# Altium PCB PCB1.PcbDoc
Units mm, origin at the board's own origin, x right, y up, seen from the top; angles counter-clockwise.
Board outline 100 x 86.6 mm, 2 copper layers (Top Layer, Bottom Layer); 48 components, 23 nets, 180 pads, 258 vias.
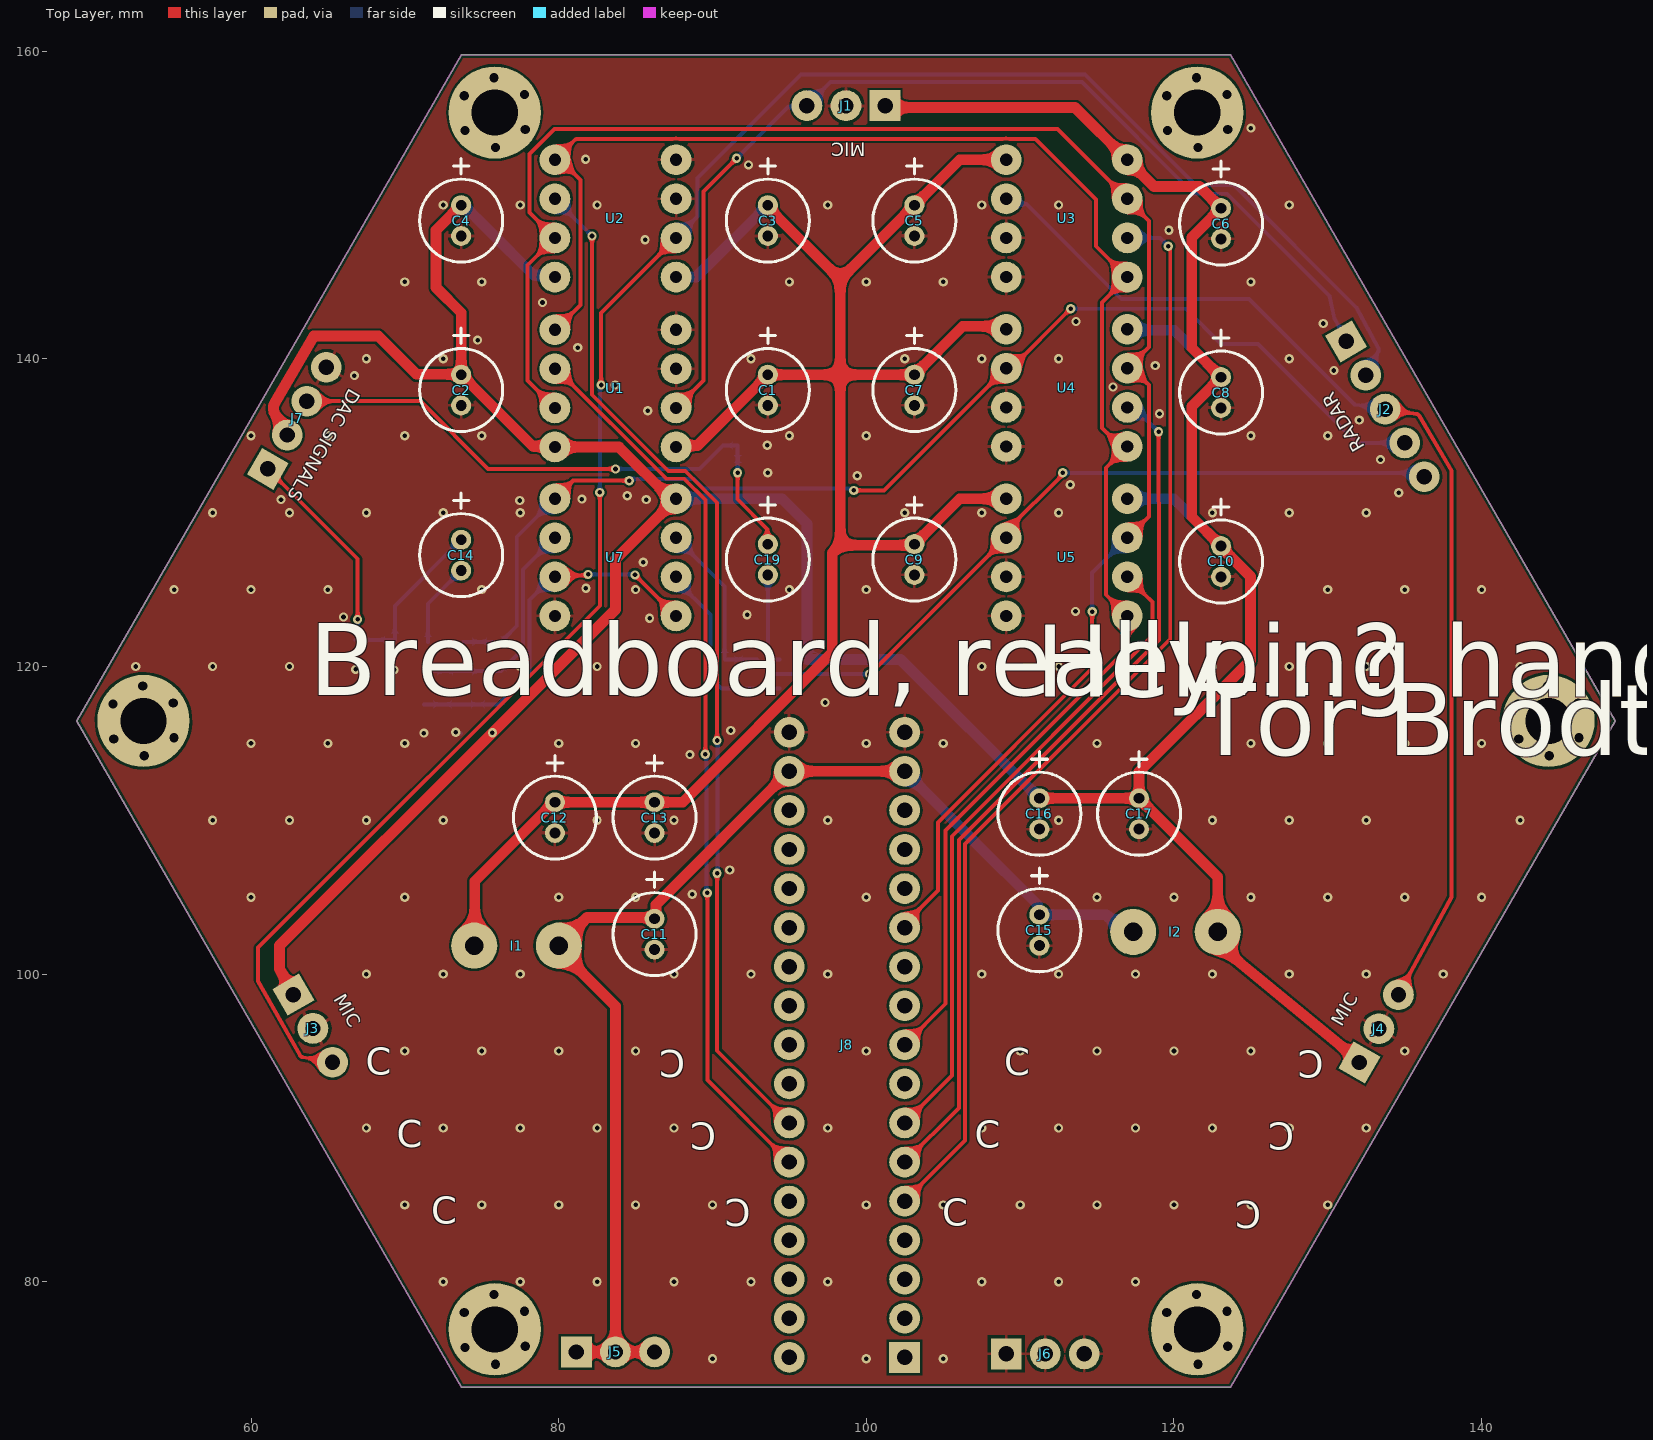
[diagram p0: Top Layer view]
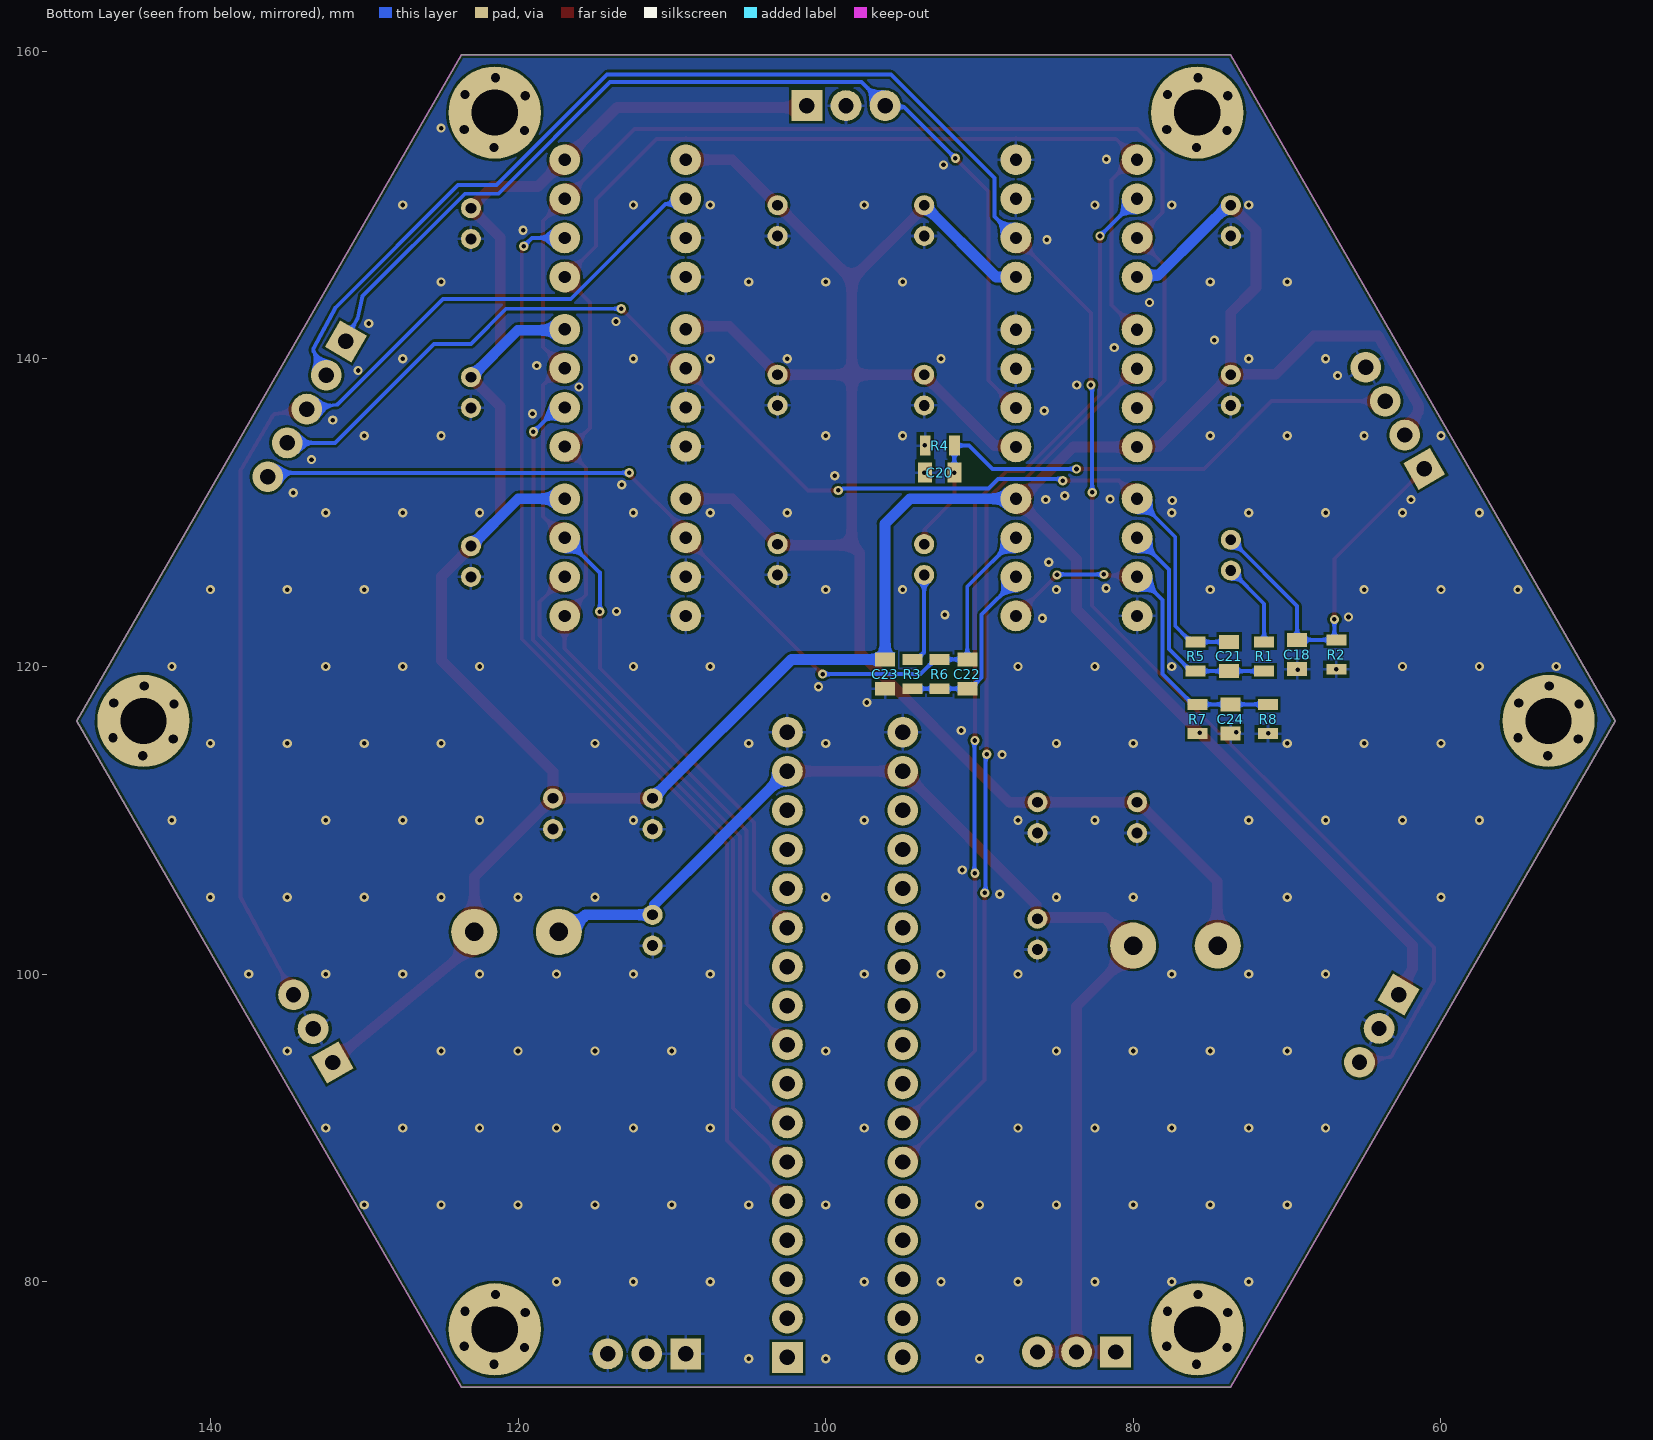
[diagram p1: Bottom Layer view, seen from below]
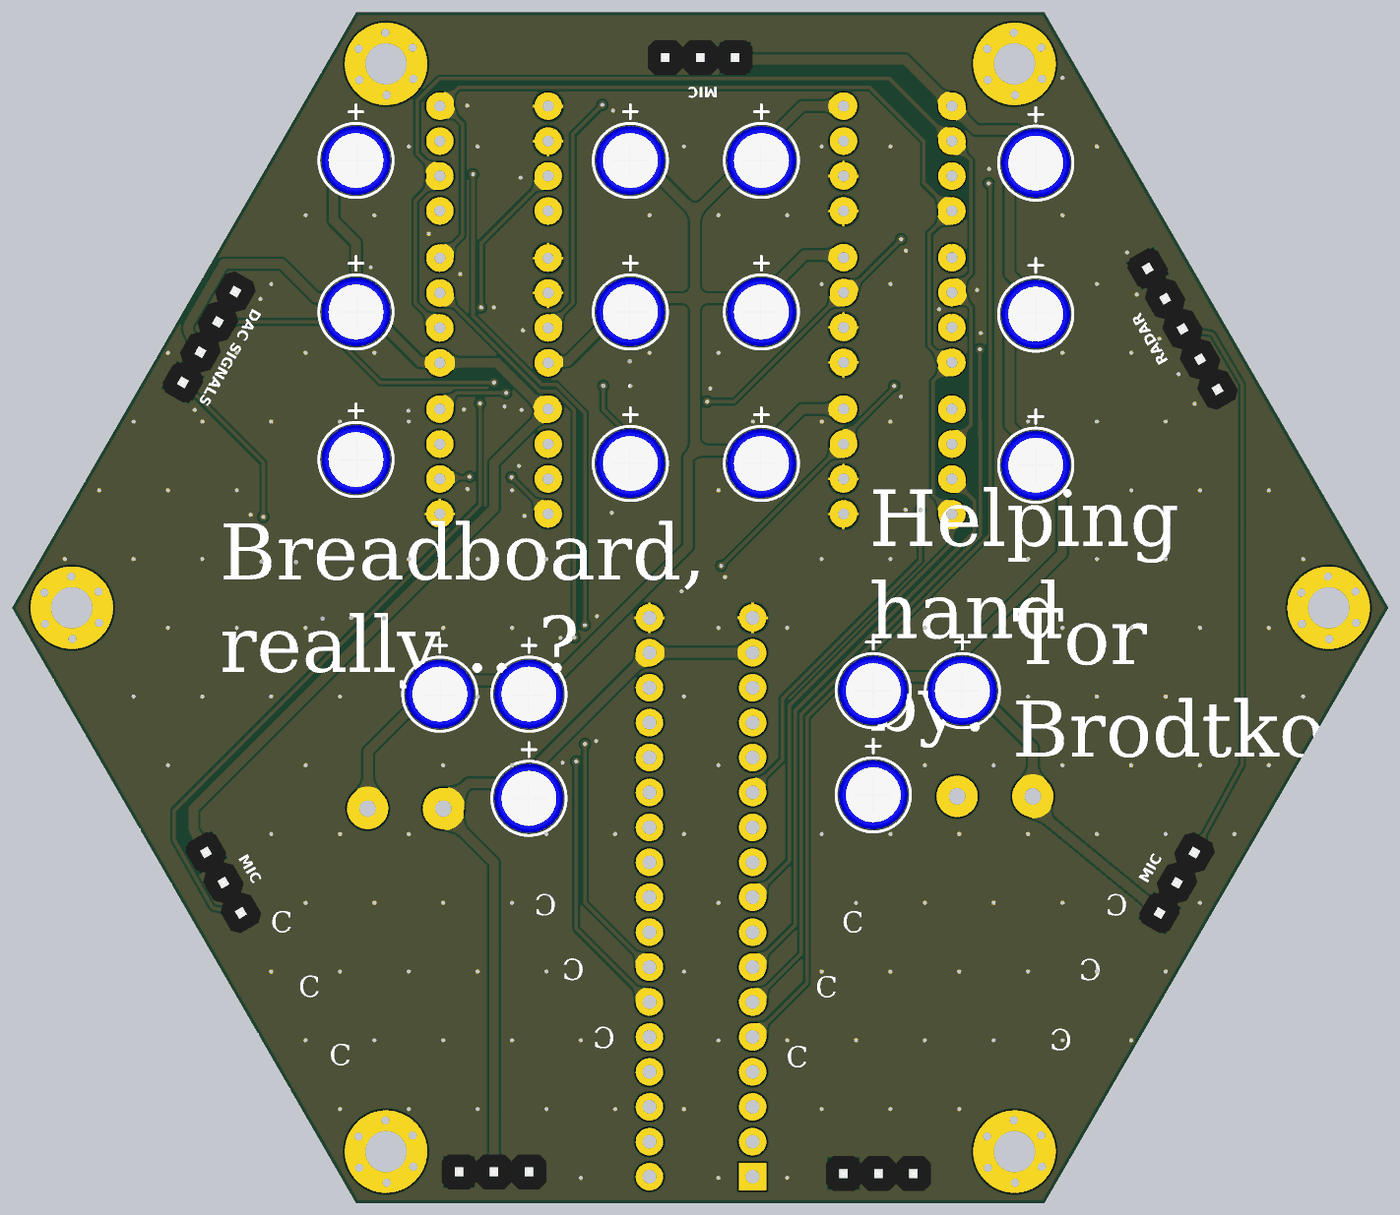
[diagram p2: 3D render of the assembled board from above, using the file's embedded part models]
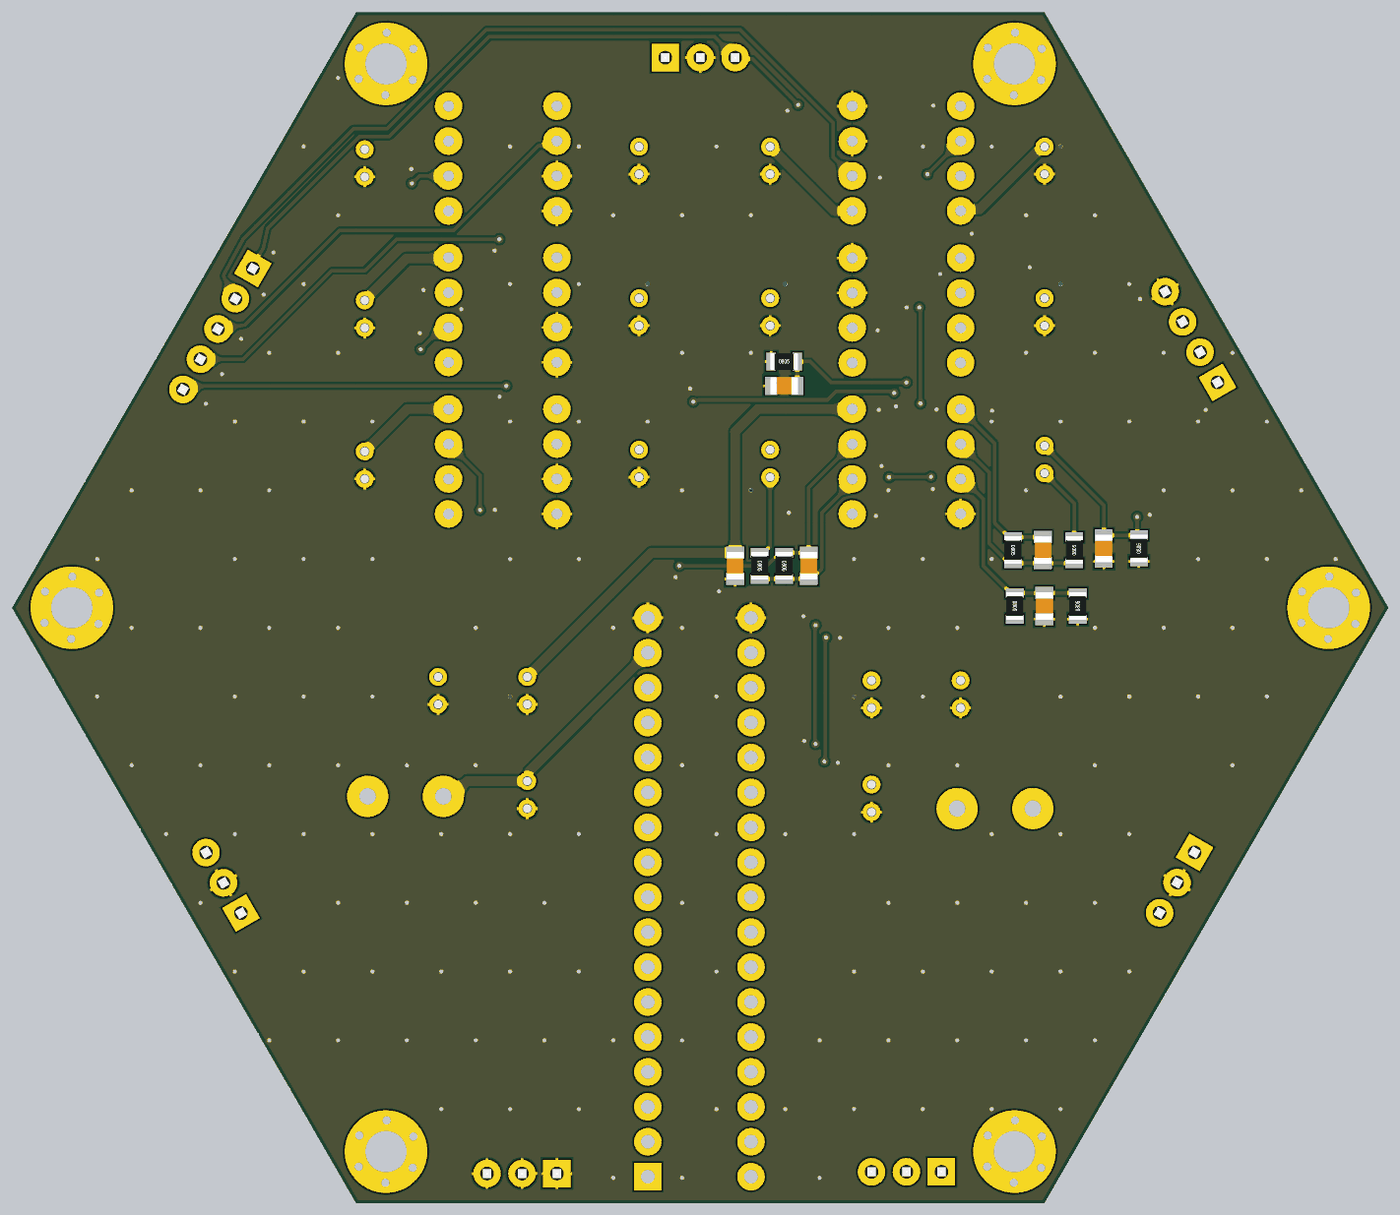
[diagram p3: 3D render of the assembled board from below, using the file's embedded part models]

## Layer stack, top to bottom
Top Solder: solder mask 0.0102, Solder Resist, Dk 3.5
Top Layer: signal copper 0.0356
Dielectric 1: dielectric 0.32, FR-4, Dk 4.8
Bottom Layer: signal copper 0.0356
Bottom Solder: solder mask 0.0102, Solder Resist, Dk 3.5

## Board outline
73.679,73.158 48.679,116.459 73.679,159.76 123.679,159.76 148.679,116.459 123.679,73.158

## Design rules (kind name [scope] priority, off if disabled: settings)
Clearance [All] p1: gap=0.16 ignorepadtopadclearanceinfootprint=FALSE except(0: Arc-Text Arc-Hole Track-Text Track-Hole SMDPad-Text SMDPad-Hole THPad-Text THPad-Hole Via-Text Via-Hole Fill-Text Fill-Hole Poly-Text Poly-Hole Region-Text Region-Hole Text-Text Text-Hole)
DiffPairsRouting [All] p1: maxlimit=0.254 minlimit=0.254 mostfreqgap=0.254 toplayer_minwidth=0.16 toplayer_maxwidth=0.381 toplayer_prefwidth=0.2 bottomlayer_minwidth=0.16 bottomlayer_maxwidth=0.381 bottomlayer_prefwidth=0.2 maxuncoupledlength=12.7
Height [All] p1: minheight=0 maxheight=200 prefheight=12.7
HoleSize [All] p1: absolutevalues=TRUE maxlimit=6.35 minlimit=0.3 maxpercent=80.000 minpercent=20.000
MinimumSolderMaskSliver [All] p1: minsoldermaskwidth=0.1
PlaneClearance [All] p1: clearance=1
PlaneConnect [All] p1: planeconnectstyle=Relief reliefexpansion=0.508 reliefentries=4 reliefconductorwidth=1 reliefairgap=0.254
PolygonConnect PolygonConnect_1 [IsVia] p1: connectstyle=Direct reliefconductorwidth=0.254 reliefentries=4 polygonreliefangle="90 Angle" airgapwidth=0.254
PolygonConnect [All] p2: connectstyle=Relief reliefconductorwidth=0.2 reliefentries=4 polygonreliefangle="90 Angle" airgapwidth=0.2
RoutingVias [All] p1: holewidth=0.3 width=0.6 viastyle="Through Hole" minholewidth=0.3 minwidth=0.6 maxholewidth=6.35 maxwidth=10
SilkToSolderMaskClearance [IsPad] p1: minsilkscreentomaskgap=0.178 clearancetoexposedcopper=TRUE
SolderMaskExpansion [All] p1: expansion=0.102 istentingtop=FALSE
Width [All] p1: maxlimit=5 minlimit=0.16 preferedwidth=0.25 minimp=50.000000 maximp=50.000000 favimp=50.000000
23 further rules are at their usual default settings.

## Components (designator, comment, footprint, x,y, rotation, side; value= is the part's Value field where it differs from the comment)
C1 "47uF" CAPPR20D05H11 93.599,136.97 r90 top
C2 "47uF" CAPPR20D05H11 73.66,136.97 r90 top
C3 "47uF" CAPPR20D05H11 93.599,147.987 r90 top
C4 "47uF" CAPPR20D05H11 73.66,147.987 r90 top
C5 "47uF" CAPPR20D05H11 103.124,147.987 r90 top
C6 "47uF" CAPPR20D05H11 123.063,147.796 r90 top
C7 "47uF" CAPPR20D05H11 103.124,136.97 r90 top
C8 "47uF" CAPPR20D05H11 123.063,136.811 r90 top
C9 "47uF" CAPPR20D05H11 103.124,125.952 r90 top
C10 "47uF" CAPPR20D05H11 123.063,125.825 r90 top
C11 "47uF" CAPPR20D05H11 86.233,101.6 r90 top
C12 "47uF" CAPPR20D05H11 79.756,109.174 r90 top
C13 "47uF" CAPPR20D05H11 86.233,109.174 r90 top
C14 "47uF" CAPPR20D05H11 73.66,126.238 r90 top
C15 "47uF" CAPPR20D05H11 111.252,101.854 r90 top
C16 "47uF" CAPPR20D05H11 111.252,109.428 r90 top
C17 "47uF" CAPPR20D05H11 117.729,109.428 r90 top
C18 "08053C105KAT2A" C0805 69.352,120.777 r90 bottom value=100nF
C19 "47uF" CAPPR20D05H11 93.599,125.952 r90 top
C20 "08053C105KAT2A" C0805 92.583,132.598 r180 bottom value=100nF
C21 "08053C105KAT2A" C0805 73.777,120.65 r270 bottom value=100nF
C22 "08053C105KAT2A" C0805 90.795,119.507 r270 bottom value=100nF
C23 "08053C105KAT2A" C0805 96.139,119.507 r90 bottom value=100nF
C24 "08053C105KAT2A" C0805 73.67,116.586 r90 bottom value=100nF
I1 "SPOLE" PCBComponent_1 80.01,101.854 r180 top
I2 "SPOLE" PCBComponent_1 117.348,102.743 r0 top
J1 "349873-345-34_2" "Header 1x3 male" 96.139,156.464 r270 top
J2 "349873-345-34_4" "Header 1x5 male" 136.271,132.334 r30 top
J3 "349873-345-34_2" "Header 1x3 male" 65.296,94.269 r30 top
J4 "349873-345-34_2" "Header 1x3 male" 134.594,98.656 r150 top
J5 "349873-345-34_2" "Header 1x3 male" 86.233,75.438 r90 top
J6 "349873-345-34_2" "Header 1x3 male" 114.173,75.311 r90 top
J7 "349873-345-34_3" "Header 1x4 male" 64.897,139.446 r150 top
J8 "Header 2x17 female 2.56" "Header 2x17 female 2.56" 102.489,93.726 r180 top
R1 "CRCW08050000Z0EA" R0805 71.498,120.65 r90 bottom value=1k
R2 "CRCW08050000Z0EA" R0805 66.799,120.777 r90 bottom value=1k
R3 "CRCW08050000Z0EA" R0805 94.364,119.507 r270 bottom value=1k
R4 "CRCW08050000Z0EA" R0805 92.583,134.363 r180 bottom value=1k
R5 "CRCW08050000Z0EA" R0805 75.949,120.65 r270 bottom value=1k
R6 "CRCW08050000Z0EA" R0805 92.586,119.507 r270 bottom value=1k
R7 "CRCW08050000Z0EA" R0805 75.822,116.586 r270 bottom value=1k
R8 "CRCW08050000Z0EA" R0805 71.244,116.586 r90 bottom value=1k
U1 "ADC" SOKKEL8 87.63,141.891 r180 top
U2 "ADC" SOKKEL8 87.63,152.94 r180 top
U3 "ADC" SOKKEL8 109.093,145.32 r0 top
U4 "ADC" SOKKEL8 109.093,134.303 r0 top
U5 "ADC" SOKKEL8 109.093,123.285 r0 top
U7 "OPAMP" SOKKEL8 79.756,123.285 r0 top

## Footprints (in the part's own frame and the unit in brackets; to place one, negate y for a bottom-side part, rotate by r counter-clockwise, add the part's x,y. Pads: shape width x height; smd on the part's side, far side on the other; paste and mask are expansions set on the pad)
C0805 [mm]
  rect 0.9x1.3 smd: 1(-0.95,0) 2(0.95,0)
  body extent -1,-0.62 1,0.63, height 0.8
CAPPR20D05H11 [mm] "D=5mm, Pitch=2.0mm, H=11mm"
  round 1.3 hole 0.7: 1(0,0) 2(2,0)
  silkscreen extent -1.7,-2.7 5.05,2.7, body extent -1.53,-2.53 3.53,2.53, height 11.53
"Header 1x3 male" [mm]
  rect 2x2 hole 1: 1(0,5.08)
  round 2 hole 1: 2(0,2.54) 3(0,0)
  body extent -1.27,-1.27 1.27,6.35, height 8.89
"Header 1x4 male" [mm]
  rect 2x2 hole 1: 1(0,7.62)
  round 2 hole 1: 2(0,5.08) 3(0,2.54) 4(0,0)
  body extent -1.27,-1.27 1.27,8.89, height 8.89
"Header 1x5 male" [mm]
  rect 2x2 hole 1: 1(0,10.16)
  round 2 hole 1: 2(0,7.62) 3(0,5.08) 4(0,2.54) 5(0,0)
  body extent -1.27,-1.27 1.27,11.43, height 8.89
"Header 2x17 female 2.56" [mm]
  rect 2x2 hole 1: 1(0,18.64)
  round 2 hole 1: 2(7.5,18.64) 3(0,16.1) 4(7.5,16.1) 5(0,13.56) 6(7.5,13.56) 7(0,11.02) 8(7.5,11.02) 9(0,8.48) 10(7.5,8.48) 11(0,5.94) 12(7.5,5.94) 13(0,3.4) 14(7.5,3.4) 15(0,0.86) 16(7.5,0.86) 17(0,-1.68) 18(7.5,-1.68) 19(0,-4.22) 20(7.5,-4.22) 21(0,-6.76) 22(7.5,-6.76) 23(0,-9.3) 24(7.5,-9.3) 25(0,-11.84) 26(7.5,-11.84) 27(0,-14.38) 28(7.5,-14.38) 29(0,-16.92) 30(7.5,-16.92) 31(0,-19.46) 32(7.5,-19.46) 33(0,-22) 34(7.5,-22)
PCBComponent_1 [mm]
  round 3 hole 1.2: 1(0,0) 2(5.5,0)
R0805 [mm]
  rect 0.7x1.3 smd: 1(-0.95,0) 2(0.95,0)
  body extent -1,-0.63 1,0.62, height 0.5
SOKKEL8 [mm]
  round 2 hole 0.8: 1(0,7.62) 2(0,5.08) 3(0,2.54) 4(0,0) 5(7.874,0) 6(7.874,2.54) 7(7.874,5.08) 8(7.874,7.62)

## Part data
C1 C2 C3 C4 C5 C6 C7 C8 C9 C10 C11 C12 C13 C14 C15 C16 C17 C19: library part 3269, "25V, Elektrolytt", antall=58, dybde=5, hylle=4, id=3269, komponenttype=2, lager_type=Fremlager, leverandor=Farnell, leverandor_varenr=9451072, navn=47uF, nokkelord="Kondensator, capacitor, Elektrolytt", pakke_opprettet="2016-11-13 14:55:27", pakke_opprettet_av=1335, pakketype=TH, pris=1, rad=7, rom=OV, symbol_opprettet="2014-06-28 15:26:13", symbol_opprettet_av=815
C18 C20 C21 C22 C23 C24: "C0805"
J1 J3 J4 J5 J6: "Header 1x3 male 2.54mm"
J2: "Header 1x5 male 2.54mm"
J7: "Header 1x4 male 2.54mm"
R1 R2 R3 R4 R5 R6 R7 R8: "R0805"

## Free pads (board coordinates)
  round 6 hole 3: ""(53.009,116.459) ""(75.844,76.908) ""(75.844,156.01) ""(121.514,76.908) ""(121.514,156.01) ""(144.349,116.459)

## Via types
v1: diameter 0.6, hole 0.3, Top Layer to Bottom Layer, tented both sides, 222 vias
v2: diameter 0.6, hole 0.6, Top Layer to Bottom Layer, tented both sides, 36 vias

## Nets (pads, with @x,y where several pads share a name; then routed paths per layer and width w, separated by ;. In a path a pad name is that pad's centre, name@x,y a point inside that pad or via, vN(x,y) a via of type N, cw(c..) or ccw(c..) an arc to the next point about the centre after c; other vN are vias at no path point)
3V: C11.2 C15.2 I1.1 I2.1 J5.1 J5.2 J5.3 J8.31 J8.32 | length 80.2
  Top Layer w0.7: J5.1 J5.2 ; J5.3 J5.2 ; J8.31 J8.32 86.32,104.517 86.32,103.687 81.843,103.687 I1.1 80.01,101.6 83.693,97.917 J5.2
  Bottom Layer w0.7: J8.31 106.937,108.738 106.937,108.709 111.137,104.509 111.137,103.969 C15.2 115.615,103.854 116.726,102.743 I2.1
A3V: C1.2 C3.2 C5.2 C7.2 C9.2 C12.2 C13.2 I1.2 U1.1 U2.1 U3.1 U4.1 U5.1 | length 123.6
  Top Layer w0.7: I1.2@74.549,101.893 74.549,106.045 79.678,111.174 C12.2 C13.2 88.06,111.174 97.79,120.904 97.79,127.381 98.298,127.889 ; U1.1 87.729,134.369 89.03,134.369 93.599,138.938 C1.2 98.298,138.97 ; C3.2 93.599,149.86 98.298,145.161 ; U5.1 106.077,130.905 C9.2 103.06,127.889 98.298,127.889 ; U4.1 108.903,142.113 106.267,142.113 103.124,138.97 98.298,138.97 ; U3.1 106.077,152.94 C5.2 98.298,145.161 ; 98.298,127.889 98.298,138.97 ; 98.298,138.97 98.298,145.161
  Bottom Layer w0.7: U2.1 88.932,145.32 C3.2
ADC1: J1.3 J2.1 U1.2 | length 67.4
  Top Layer w0.254: U1.2 89.408,138.589 89.408,150.876 v1(91.567,153.035)
  Bottom Layer w0.25: 130.103,144.081 130.42,142.659 ccw(c130.665,142.713) 130.448,142.589 ; 130.448,142.588 130.826,141.933 J2.1
  Bottom Layer w0.254: v1(91.567,153.035) 94.907,156.375 96.05,156.375 97.663,157.988 114.012,157.988 121.266,150.734 123.451,150.734 130.103,144.081
ADC2: J2.2 J3.3 U2.2 | length 128.7
  Top Layer w0.254: 63.187,94.72 ccw(c63.408,94.845) 63.366,94.595 J3.3 ; 63.186,94.72 60.452,99.568 60.452,101.727 82.675,123.95 82.675,131.316 v1(82.677,131.318) ; v1(82.756,138.303) 82.756,142.986 U2.2
  Bottom Layer w0.25: 131.849,143.351 133.286,140.708 cw(c133.066,140.588) 133.286,140.47 J2.2
  Bottom Layer w0.254: v1(82.677,131.318) 82.677,138.224 v1(82.756,138.303) ; U2.2 89.027,149.257 89.027,151.765 95.758,158.496 114.204,158.496 121.4,151.3 123.9,151.3 131.849,143.351
ADC3: J2.3 J4.3 U3.2 | length 71.7
  Top Layer w0.25: J2.3 135.773,136.416 cw(c135.734,136.169) 135.95,136.296 138.049,132.715 ; J4.3 138.049,105.029
  Top Layer w0.254: U3.2@108.998,150.4 U3.2 ; 138.049,105.029 138.049,132.715
  Bottom Layer w0.25: U3.2 109.428,150.065 110.405,150.065 116.57,143.9 124.878,143.9 131.639,137.139 ccw(c131.857,137.262) 131.819,137.015 J2.3
ADC4: C21.1 J2.4 R5.1 U4.2 U7.1 | length 77.8
  Top Layer w0.254: U7.1 80.931,132.08 v1(84.582,132.08) ; v1(99.187,131.445) 101.155,131.445 U4.2 109.411,139.383 v1(113.284,143.256)
  Bottom Layer w0.254: C21.1 76.249,121.6 76.472,121.823 76.472,121.831 77.277,122.636 77.277,128.426 U7.1 ; v1(84.582,132.08) 84.694,132.192 88.788,132.192 89.408,131.572 98.865,131.572 98.926,131.511 99.121,131.511 v1(99.187,131.445) ; v1(113.284,143.256) 120.777,143.256 123.063,140.97 125.476,140.97 131.912,134.534 J2.4
ADC5: C22.1 J2.5 R6.1 U5.2 U7.7 | length 61.3
  Top Layer w0.254: v1(100.203,119.507) 100.234,119.507 U5.2 ; U5.2@109.093,128.27 109.093,128.811 112.776,132.494 v1(112.776,132.588) ; J2.5@136.081,132.524 J2.5
  Bottom Layer w0.254: U7.7 90.795,125.201 C22.1 R6.1 92.886,120.457 93.836,119.507 v1(100.203,119.507) ; v1(112.776,132.588) 136.017,132.588 J2.5
CLK: J8.23 U1.7 U2.7 U3.7 U4.7 U5.7 | length 116
  Top Layer w0.254: U1.7 77.978,138.589 77.978,146.082 U2.7 78.105,149.511 78.105,153.305 79.74,154.94 112.427,154.94 U3.7 116.967,150.368 118.364,148.971 118.364,140.78 U4.7 117.284,139.383 118.364,138.303 118.364,129.762 U5.7 ; J8.23 102.489,103.268 104.648,105.427 104.648,109.855 114.681,119.888 v1(114.681,123.571)
  Bottom Layer w0.254: v1(114.681,123.571) 114.681,126.079 ; 114.681,126.111 114.681,126.079 ; U5.7 114.681,126.079
CS: J8.17 U1.5 U2.5 U3.5 U4.5 U5.5 | length 114.4
  Top Layer w0.254: U1.5 79.788,141.891 81.407,143.51 81.407,151.638 80.105,152.94 U2.5 81.047,154.231 cw(c81.226,154.051) 81.226,154.305 87.402,154.305 ccw(c87.402,154.559) 87.437,154.307 cw(c87.63,152.94) 87.823,154.307 ccw(c87.858,154.559) 87.858,154.305 108.865,154.305 ccw(c108.865,154.559) 108.9,154.307 cw(c109.093,152.94) 109.286,154.307 ccw(c109.321,154.559) 109.321,154.305 110.892,154.305 cw(c110.893,154.051) 111.072,154.231 114.935,150.368 114.935,147.32 116.935,145.32 U3.5 115.316,143.669 115.316,135.509 U4.5@116.522,134.303 ; J8.17 105.156,98.073 105.156,109.347 116.967,121.158 U5.5 115.586,124.666 115.586,132.922 116.523,133.858 U4.5@116.523,134.303 ; U4.5 U4.5@116.523,134.303
D1: J8.12 U1.6 | length 58.6
  Top Layer w0.254: U1.6 79.861,139.351 87.005,132.207 88.149,132.207 89.535,130.821 v1(89.535,114.3) ; v1(89.662,105.283) 89.662,93.113 J8.12
  Bottom Layer w0.254: v1(89.535,114.3) 89.599,114.236 89.599,105.346 v1(89.662,105.283)
D2: J8.14 U2.6 | length 67.1
  Top Layer w0.254: v1(82.169,147.987) 82.169,137.668 87.122,132.715 88.226,132.715 90.297,130.644 v1(90.297,115.189) ; v1(90.297,106.553) 90.297,95.018 J8.14
  Bottom Layer w0.254: U2.6 v1(82.169,147.987) ; v1(90.297,106.553) 90.336,106.592 90.336,115.15 v1(90.297,115.189)
D3: J8.9 U3.6 | length 72.2
  Top Layer w0.254: J8.9 106.426,89.183 106.426,108.458 119.761,121.793 119.761,146.998 119.7,147.059 119.7,147.254 v1(119.634,147.32)
  Bottom Layer w0.254: U3.6 119.094,147.86 v1(119.634,147.32)
D3V: C2.2 C4.2 C6.2 C8.2 C10.2 C16.2 C17.2 C23.2 I2.2 J1.1 J3.1 J4.1 J7.2 R7.2 U1.8 U2.8 U3.8 U4.8 U5.8 U7.8 | length 250.6
  Top Layer w0.25: I2.2 122.927,101.94 122.937,101.837 I2.2@123.145,101.667 ; J4.1@131.808,94.558 132.02,94.384 132.037,94.319 132.038,94.317 132.041,94.307 J4.1
  Top Layer w0.254: U4.8 U4.8@117.031,141.859
  Top Layer w0.7: 61.882,100.272 62.358,99.448 J3.1 ; 61.882,100.272 cw(c62.099,100.397) 61.849,100.397 61.849,101.854 v1(75.692,115.697) 83.693,123.698 83.693,126.968 U7.8 87.278,130.905 83.913,134.271 U1.8 79.705,134.322 78.308,134.322 C2.2 ; J7.2 61.547,136.428 cw(c62.152,136.781) 61.546,137.132 64.071,141.478 68.272,141.478 70.75,139 73.63,139 C2.2 ; C4.2 72.711,149.038 72.03,148.357 72.03,144.63 73.66,143 C2.2 ; J1.1 101.219,156.337 113.57,156.337 U3.8 118.707,151.2 121.659,151.2 C6.2 121.158,147.892 121.158,140.716 C8.2 121.158,136.906 121.158,129.731 C10.2 123.063,127.762 124.968,125.857 124.968,120.396 117.729,113.157 C17.2 ; C16.2 C17.2 ; I2.2@122.886,102.743 122.848,102.781 122.848,106.309 C17.2 ; I2.2@123.145,101.667 J4.1@131.808,94.558
  Bottom Layer w0.7: C4.2 73.822,149.987 75.43,148.379 78.373,145.436 79.64,145.436 U2.8 ; U7.8 94.52,130.905 96.155,129.27 96.139,129.254 C23.2 102.223,120.457 C16.2 ; U5.8 119.983,130.905 C10.2 ; U4.8@117.031,141.859 120.015,141.859 C8.2
D4: J8.11 U4.6 | length 57
  Top Layer w0.254: J8.11 106.012,91.309 106.012,108.712 119.026,121.726 119.026,126.111 v1(118.999,135.255)
  Bottom Layer w0.254: U4.6 117.411,136.843 v1(118.999,135.255)
D5: J8.13 U5.6 | length 42.9
  Top Layer w0.254: J8.13 105.57,93.407 105.57,108.966 118.612,122.008 118.612,124.181 118.094,124.698 U5.6
GND: C1.1 C2.1 C3.1 C4.1 C5.1 C6.1 C7.1 C8.1 C9.1 C10.1 C11.1 C12.1 C13.1 C15.1 C16.1 C17.1 C18.1 C20.1 C23.1 C24.1 J1.2 J3.2 J4.2 J6.1 J6.2 J6.3 J7.4 J8.33 J8.34 R2.1 R4.1 R8.1 U1.3 U1.4 U2.3 U2.4 U3.3 U3.4 U4.3 U4.4 U5.3 U5.4 U7.4 | length 0.4
  Bottom Layer w0.25: v1(73.31,115.73) 73.404,115.636 C24.1
  other v1: 90,75 100,75 105,75 72.5,80 77.5,80 82.5,80 87.5,80 92.5,80 97.5,80 107.5,80 112.5,80 117.5,80 70,85 75,85 80,85 85,85 90,85 100,85 105,85 110,85 115,85 120,85 125,85 130,85 67.5,90 72.5,90 77.5,90 82.5,90 87.5,90 97.5,90 107.5,90 112.5,90 117.5,90 122.5,90 127.5,90 132.5,90 70,95 75,95 80,95 85,95 100,95 110,95 115,95 120,95 125,95 135,95 67.5,100 72.5,100 77.5,100 87.5,100 92.5,100 97.5,100 107.5,100 112.5,100 117.5,100 122.5,100 127.5,100 132.5,100 137.5,100 60,105 70,105 80,105 85,105 100,105 115,105 120,105 125,105 130,105 135,105 140,105 88.68,105.19 91.12,106.77 57.5,110 62.5,110 67.5,110 72.5,110 82.5,110 87.5,110 97.5,110 112.5,110 122.5,110 127.5,110 132.5,110 142.5,110 88.53,114.27 60,115 65,115 70,115 80,115 85,115 100,115 105,115 115,115 125,115 130,115 135,115 140,115 71.24,115.67 91.18,115.84 97.32,117.66 100.47,118.68 69.3,119.78 66.8,119.81 52.5,120 57.5,120 62.5,120 77.5,120 82.5,120 87.5,120 107.5,120 112.5,120 122.5,120 127.5,120 132.5,120 142.5,120 85.91,123.14 66.01,123.22 92.25,123.37 113.6,123.58 55,125 60,125 65,125 75,125 85,125 95,125 100,125 130,125 135,125 140,125 81.77,125.09 85.5,126.77 57.5,130 62.5,130 67.5,130 72.5,130 77.5,130 102.5,130 107.5,130 112.5,130 122.5,130 127.5,130 132.5,130 77.47,130.79 61.95,130.85 85.7,130.85 81.51,130.88 84.46,131.1 134.61,131.29 113.26,131.81 99.41,132.4 93.59,132.59 133.43,133.45 93.556,134.384 60,135 65,135 70,135 75,135 95,135 100,135 125,135 130,135 132.04,136.02 119.06,136.43 85.79,136.63 116.04,138.17 83.68,138.3 66.72,138.91 130.4,139.24 118.79,139.56 67.5,140 72.5,140 92.5,140 102.5,140 107.5,140 112.5,140 127.5,140 81.24,140.73 74.73,141.22 129.7,142.3 113.63,142.43 78.95,143.66 70,145 75,145 95,145 100,145 105,145 125,145 85.62,147.74 119.67,148.36 72.5,150 77.5,150 82.5,150 97.5,150 107.5,150 112.5,150 127.5,150 92.34,152.61 81.75,152.98 125,155
NetC14_1: C14.1 R1.2 | length 5.5
  Bottom Layer w0.254: R1.2 71.498,124.076 C14.1
NetC19_1: C19.1 R3.1 | length 6
  Bottom Layer w0.254: C19.1 93.599,120.922 94.064,120.457 R3.1
NetC21_2: C21.2 R1.1 R5.2 U7.2 | length 14.9
  Bottom Layer w0.254: R1.1 C21.2 76.249,119.7 77.691,121.142 77.691,126.3 U7.2
NetC22_2: C22.2 R3.2 R6.2 U7.6 | length 12.3
  Bottom Layer w0.254: U7.6 87.63,125.603 89.858,123.375 89.858,119.294 90.595,118.557 R6.2 R3.2
NetC24_2: C24.2 R7.1 R8.2 U7.3 U7.5 | length 23.8
  Top Layer w0.254: U7.3 79.848,125.918 81.849,125.918 v1(81.915,125.984) ; v1(84.963,125.952) U7.5
  Bottom Layer w0.254: R8.2 C24.2 76.122,117.536 78.105,119.519 78.105,124.333 79.597,125.825 U7.3 ; v1(81.915,125.984) 84.931,125.984 v1(84.963,125.952)
R1: C14.2 C18.2 J7.1 R2.2 | length 24.4
  Top Layer w0.254: J7.1 66.929,127.005 v1(66.929,123.063)
  Bottom Layer w0.254: v1(66.929,123.063) 66.929,121.857 R2.2 C18.2 69.352,123.93 C14.2
R2: C19.2 C20.2 J7.3 R4.2 | length 37.7
  Top Layer w0.254: J7.3 71.014,137.246 75.418,132.842 v1(83.693,132.842) ; v1(91.633,132.598) 91.633,130.871 93.554,128.95 93.554,127.998 C19.2
  Bottom Layer w0.254: v1(83.693,132.842) 89.154,132.842 90.678,134.366 91.63,134.366 R4.2 91.633,134.063 v1(91.633,132.598)
pads on no net: J8.1 J8.2 J8.3 J8.4 J8.5 J8.6 J8.7 J8.8 J8.10 J8.15 J8.16 J8.18 J8.19 J8.20 J8.21 J8.22 J8.24 J8.25 J8.26 J8.27 J8.28 J8.29 J8.30
copper on no net:
  other v2: 75.89,74.64 121.56,74.64 73.903,75.734 119.573,75.734 77.831,75.814 123.501,75.814 73.857,78.002 119.527,78.002 77.785,78.081 123.455,78.081 75.798,79.175 121.468,79.175 53.055,114.191 144.395,114.191 51.068,115.285 142.408,115.285 54.996,115.365 146.336,115.365 51.022,117.553 142.362,117.553 54.95,117.633 146.29,117.633 52.963,118.727 144.303,118.727 75.89,153.743 121.56,153.743 73.903,154.837 119.573,154.837 77.831,154.916 123.501,154.916 73.857,157.104 119.527,157.104 77.785,157.184 123.455,157.184 75.798,158.278 121.468,158.278

## Polygon pours and split planes (outlines as drawn)
GND on Bottom Layer "Top Layer-No Net" (solid, remove dead copper, pour order 3): 73.679,73.158 48.679,116.459 73.679,159.76 123.679,159.76 148.679,116.459 123.679,73.158
GND on Top Layer "Top Layer-No Net" (solid, remove dead copper, pour order 2): 73.679,73.158 48.679,116.459 73.679,159.76 123.679,159.76 148.679,116.459 123.679,73.158

## Keep-outs
Keep-Out Layer:
  the board outline again, w0.1

## Silkscreen, mask and mechanical layers (free items; w line width, h text height)
Top Overlay:
  text "MIC" at 99.97,154.33 h1.5 r180
  text "DAC SIGNALS" at 66.17,138.28 h1.5 r240
  text "RADAR" at 132.7,134.41 h1.5 r120
  text "Breadboard, really....?" at 63.8,116.6 h8
  text "Helping hand by:" at 111,116.5 h8
  text "Tor Brodtkorb" at 121.4,112.7 h8
  text "MIC" at 65.08,98.25 h1.5 r300
  text "MIC" at 131.16,96.39 h1.5 r60
  text "C" at 88.23,95.63 h3 r180
  text "C" at 129.74,95.62 h3 r180
  text "C" at 67.46,92.86 h3
  text "C" at 108.97,92.85 h3
  text "C" at 90.25,90.93 h3 r180
  text "C" at 127.82,90.91 h3 r180
  text "C" at 69.48,88.16 h3
  text "C" at 107.05,88.14 h3
  text "C" at 92.489,85.966 h3 r180
  text "C" at 125.69,85.82 h3 r180
  text "C" at 71.719,83.196 h3
  text "C" at 104.92,83.05 h3